# Altium PCB CW313.PcbDoc (part 2 of 2)
Units mil, origin at the board's own origin, x right, y up, seen from the top; angles counter-clockwise.
Board outline 4415 x 2690 mil, 4 copper layers (Top Layer, Int1 (GND), Int2 (PWR), Bottom Layer), stack 53.912 mil thick; 81 components, 75 nets, 407 pads, 94 vias.
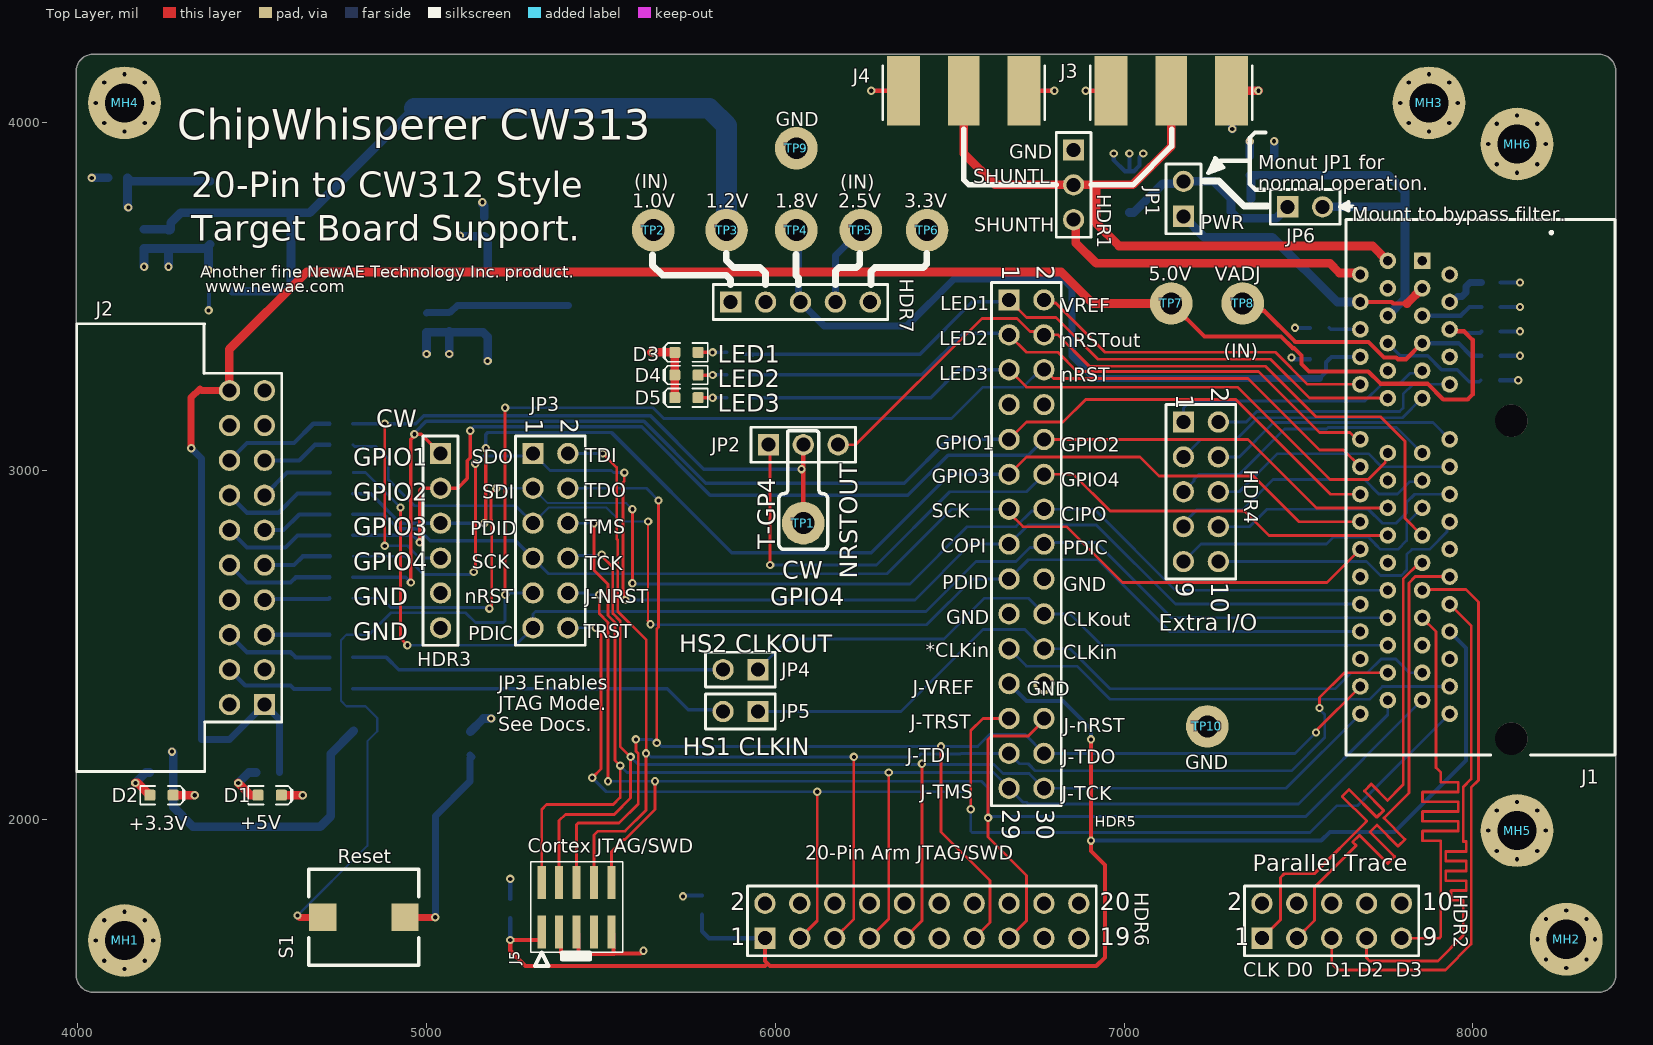
[diagram p0: Top Layer view]

## Silkscreen, mask and mechanical layers (free items; w line width, h text height) (continued)
Top Overlay: (continued)
  text "CIPO" at 6820,2855 h40
  text "TMS" at 5455,2820 h40
  text "GPIO3" at 4790,2815 h50
  text "PDID" at 5125,2815 h40
  text "T-GP4" at 6000,2775 h50 r90
  text "COPI" at 6473.69,2765 h40
  text "PDIC" at 6825,2760 h40
  text "SCK" at 5130,2720 h40
  text "GPIO4" at 4790,2715 h50
  text "TCK" at 5455,2715 h40
  text "CW" at 6020,2690 h50
  text "NRSTOUT" at 6235,2690 h50 r90
  text "PDID" at 6478.69,2660 h40
  text "GND" at 6825,2655 h40
  text "nRST" at 5110,2620 h40
  text "J-NRST" at 5455,2620 h40
  text "GND" at 4790,2615 h50
  text "GPIO4" at 5985,2615 h50
  text "GND" at 6489.74,2560 h40
  text "CLKout" at 6825,2555 h40
  text "Extra I/O" at 7099,2541.75 h47.24
  text "TRST" at 5450,2520 h40
  text "GND" at 4790,2515 h50
  text "PDIC" at 5120,2515 h40
  text "HS2 CLKOUT" at 5725,2480 h50
  text "*CLKin" at 6430.51,2465 h40
  text "CLKin" at 6825,2460 h40
  text "J-VREF" at 6393.19,2360 h40
  text "GND" at 6721.28,2355 h40
  text "J-TRST" at 6386.28,2260 h40
  text "JP3 Enables / JTAG Mode. / See Docs." at 5205,2253 h40
  text "J-nRST" at 6826.28,2250 h40
  text "HS1 CLKIN" at 5735,2185 h50
  text "J-TDI" at 6376.28,2165 h40
  text "J-TDO" at 6822.7,2160 h40
  text "GND" at 7175,2145 h40
  text "J-TMS" at 6415.61,2060 h40
  text "J-TCK" at 6820.61,2055 h40
  text "+5V" at 4466,1972 h40
  text "+3.3V" at 4146,1969 h40
  text "Cortex JTAG/SWD" at 5290,1905 h40
  text "20-Pin Arm JTAG/SWD" at 6085,1885 h40
  text "Reset" at 4745,1875 h40
  text "Parallel Trace" at 7368,1852 h47.24
  text "CLK" at 7341,1549 h40
  text "D0" at 7466,1549 h40
  text "D1" at 7576.05,1549 h40
  text "D2" at 7668.95,1549 h40
  text "D3" at 7779,1549 h40
Bottom Overlay:
  drawing of 4 lines, arcs and shapes, not listed
  text "C" at 5149,1897 h450
  text "NewAE Technology Inc. / NAE-CW313-03" at 6692,1882 h45
  text "W" at 4770,1641 h300
  text "p" at 4556,1618 h300
Mechanical 1:
  lines w10: 3995,1555 ccw(c4045,1555) 4045,1505 8360,1505 ccw(c8360,1555) 8410,1555 8410,3715 8410,4145 ccw(c8360,4145) 8360,4195 4045,4195 ccw(c4045,4145) 3995,4145 3995,1555

## Text inside footprints (layer, text, board x,y; h text height)
HDR2: Top Overlay "10" at 7855,1740 h50; Top Overlay "9" at 7855,1640 h50; Top Overlay "1" at 7315,1640 h50; Top Overlay "2" at 7295,1740 h50
HDR4: Top Overlay "10" at 7250,2680 h50 r270; Top Overlay "9" at 7150,2680 h50 r270; Top Overlay "1" at 7150,3220 h50 r270; Top Overlay "2" at 7250,3240 h50 r270
HDR5: Top Overlay "1" at 6650,3590 h50 r270; Top Overlay "2" at 6750,3590 h50 r270; Top Overlay "29" at 6650,2030 h50 r270; Top Overlay "30" at 6750,2030 h50 r270
HDR6: Top Overlay "20" at 6930,1740 h50; Top Overlay "19" at 6930,1640 h50; Top Overlay "1" at 5870,1640 h50; Top Overlay "2" at 5870,1740 h50
JP3: Top Overlay "1" at 5285,3150 h50 r270; Top Overlay "2" at 5385,3150 h50 r270